# Altium PCB DC_Buck_5V.PcbDoc
Units mil, origin at the board's own origin, x right, y up, seen from the top; angles counter-clockwise.
Board outline 2475 x 1905 mil, 2 copper layers (Top Layer, Bottom Layer); 38 components, 21 nets, 90 pads, 186 vias.
Unrouted connection lines stored in the file: 1.
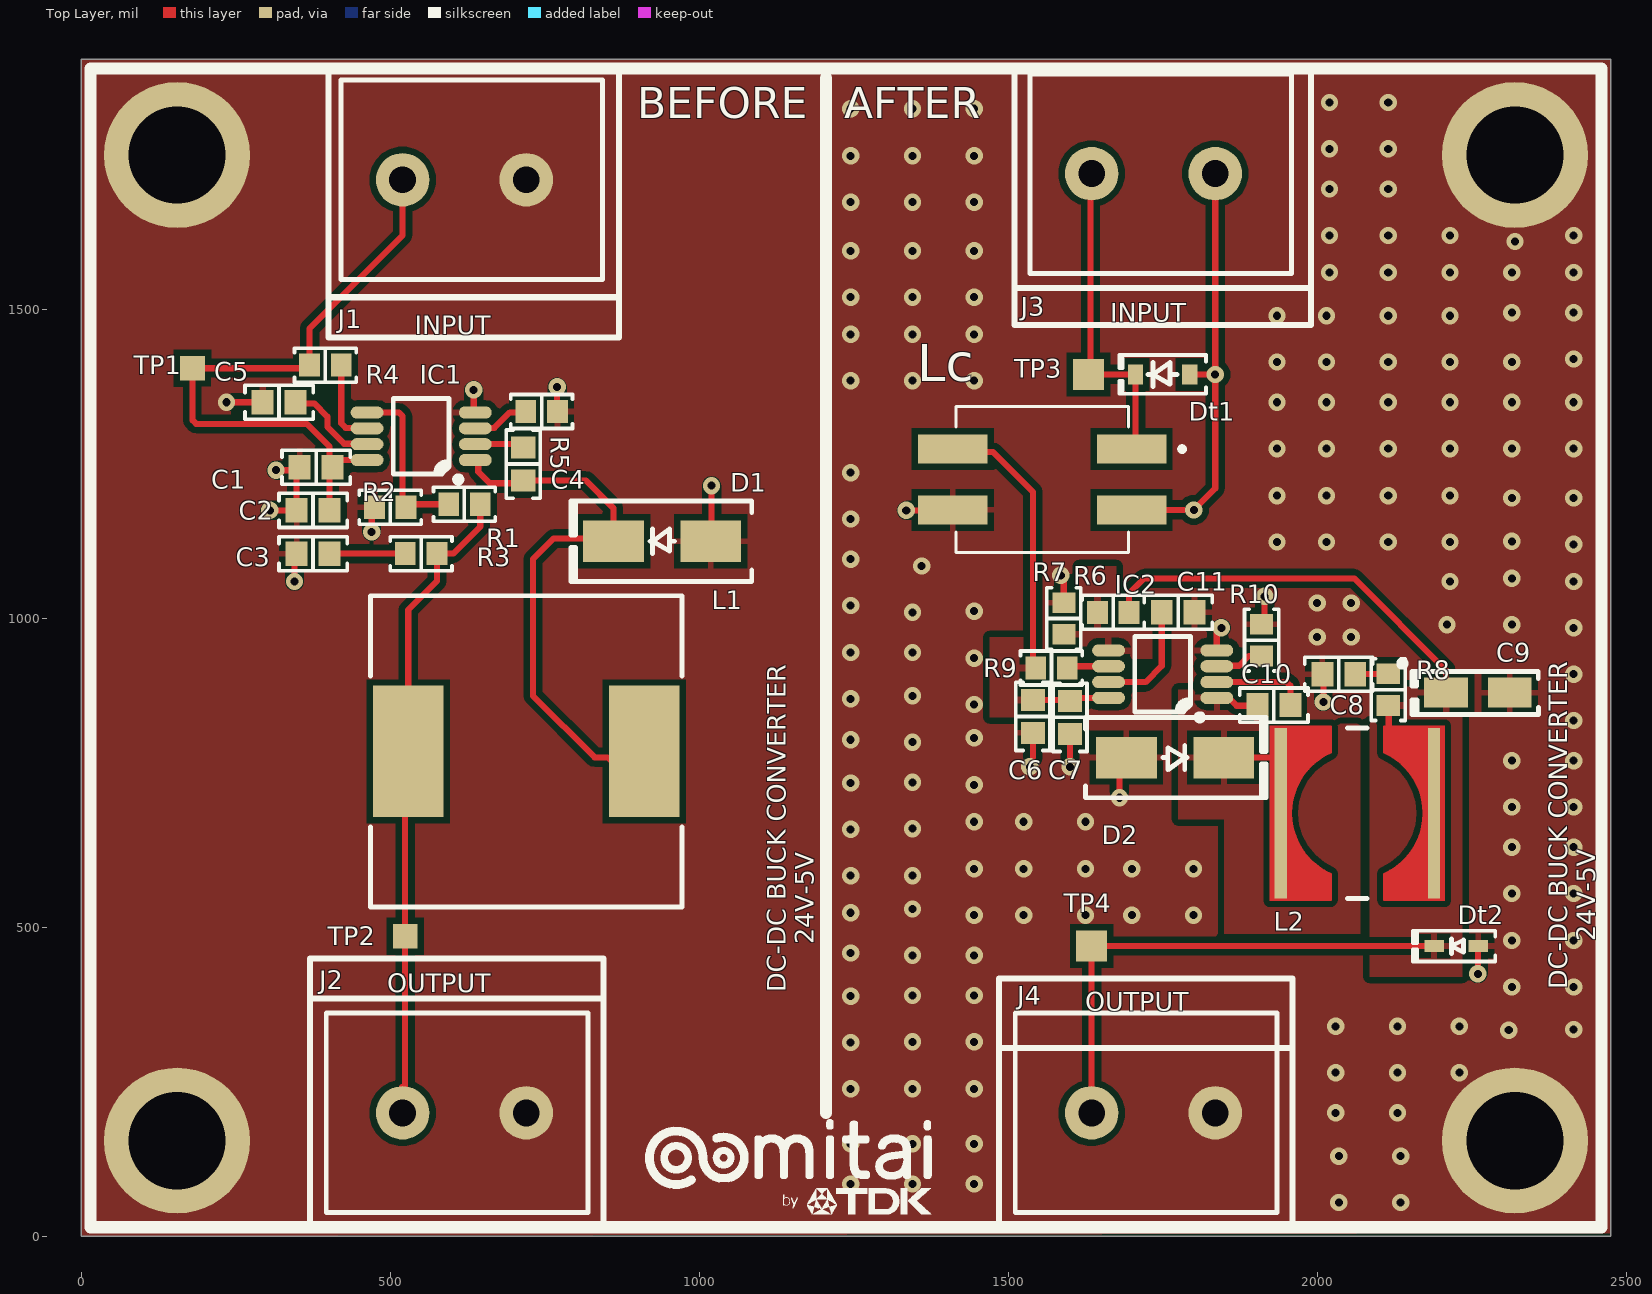
[diagram p0: Top Layer view]
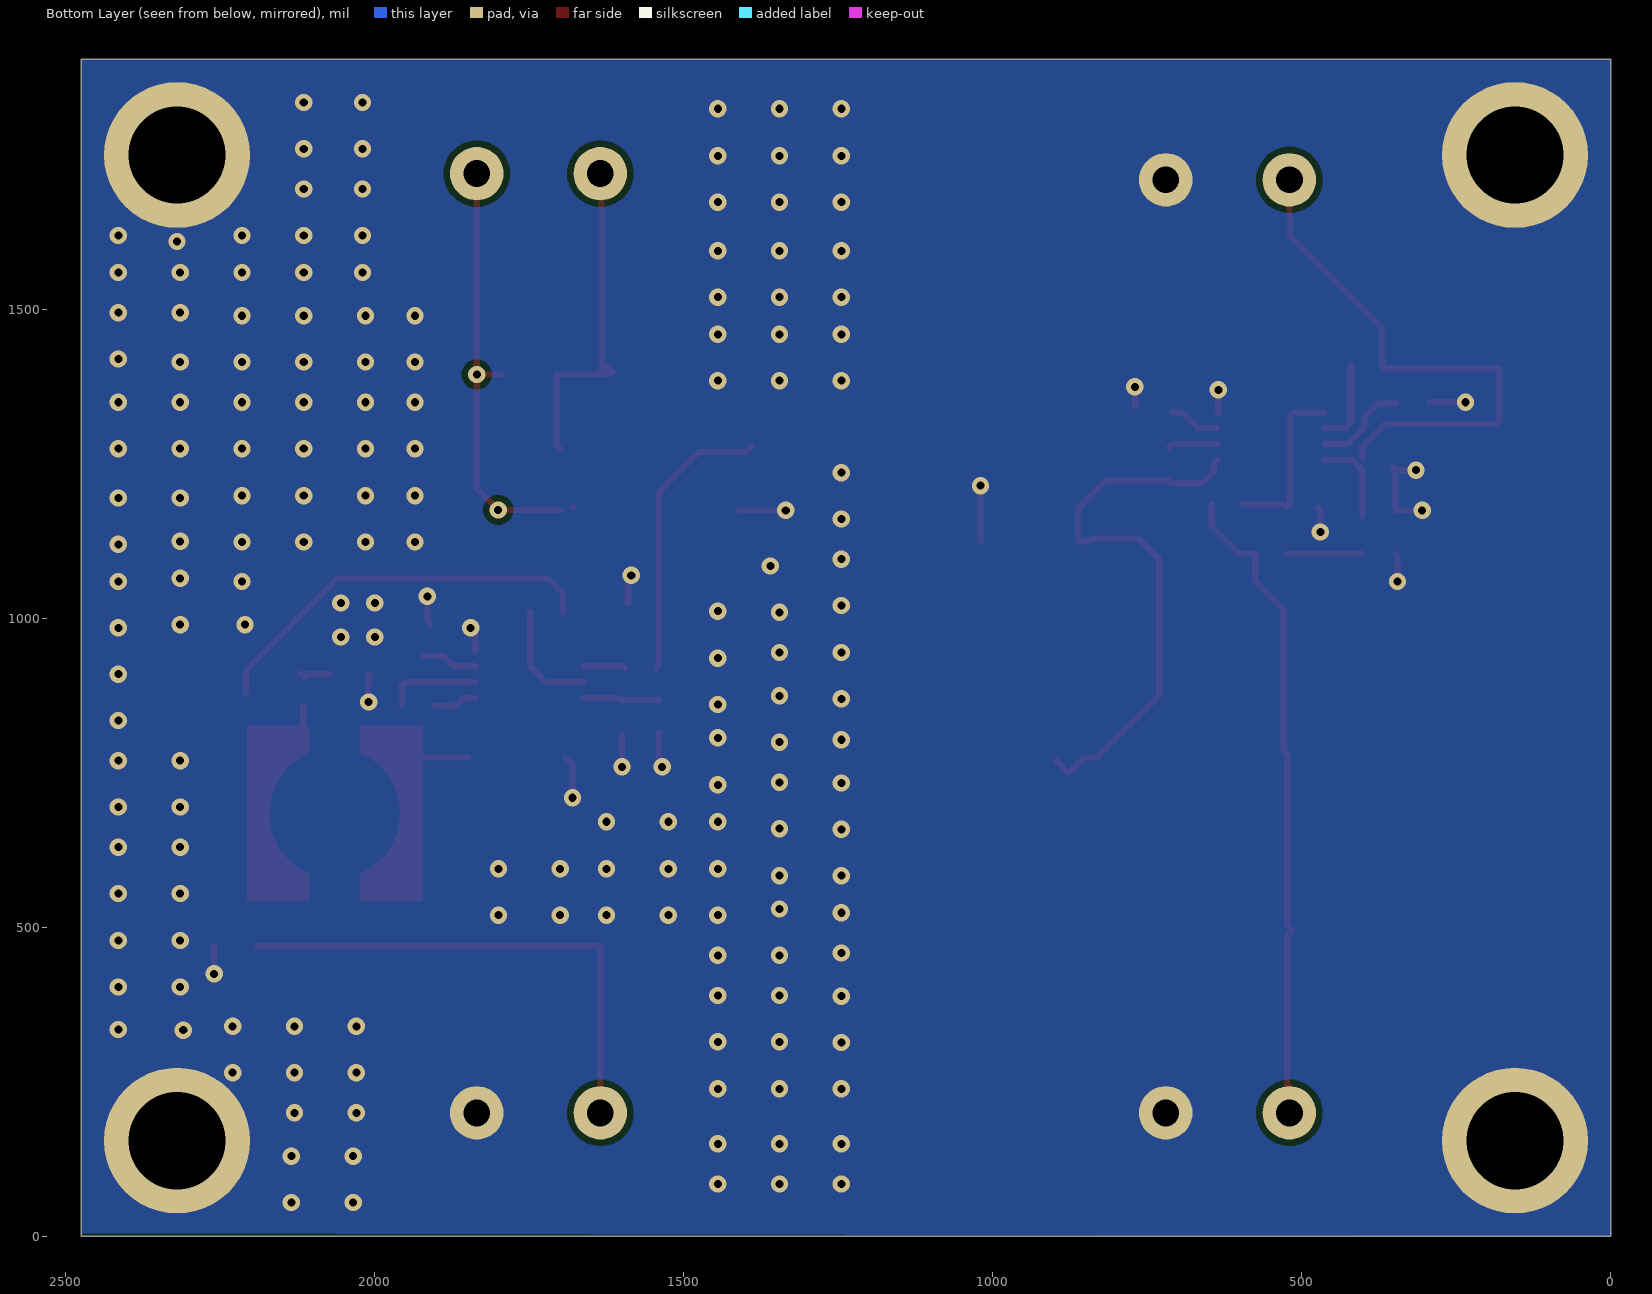
[diagram p1: Bottom Layer view, seen from below]
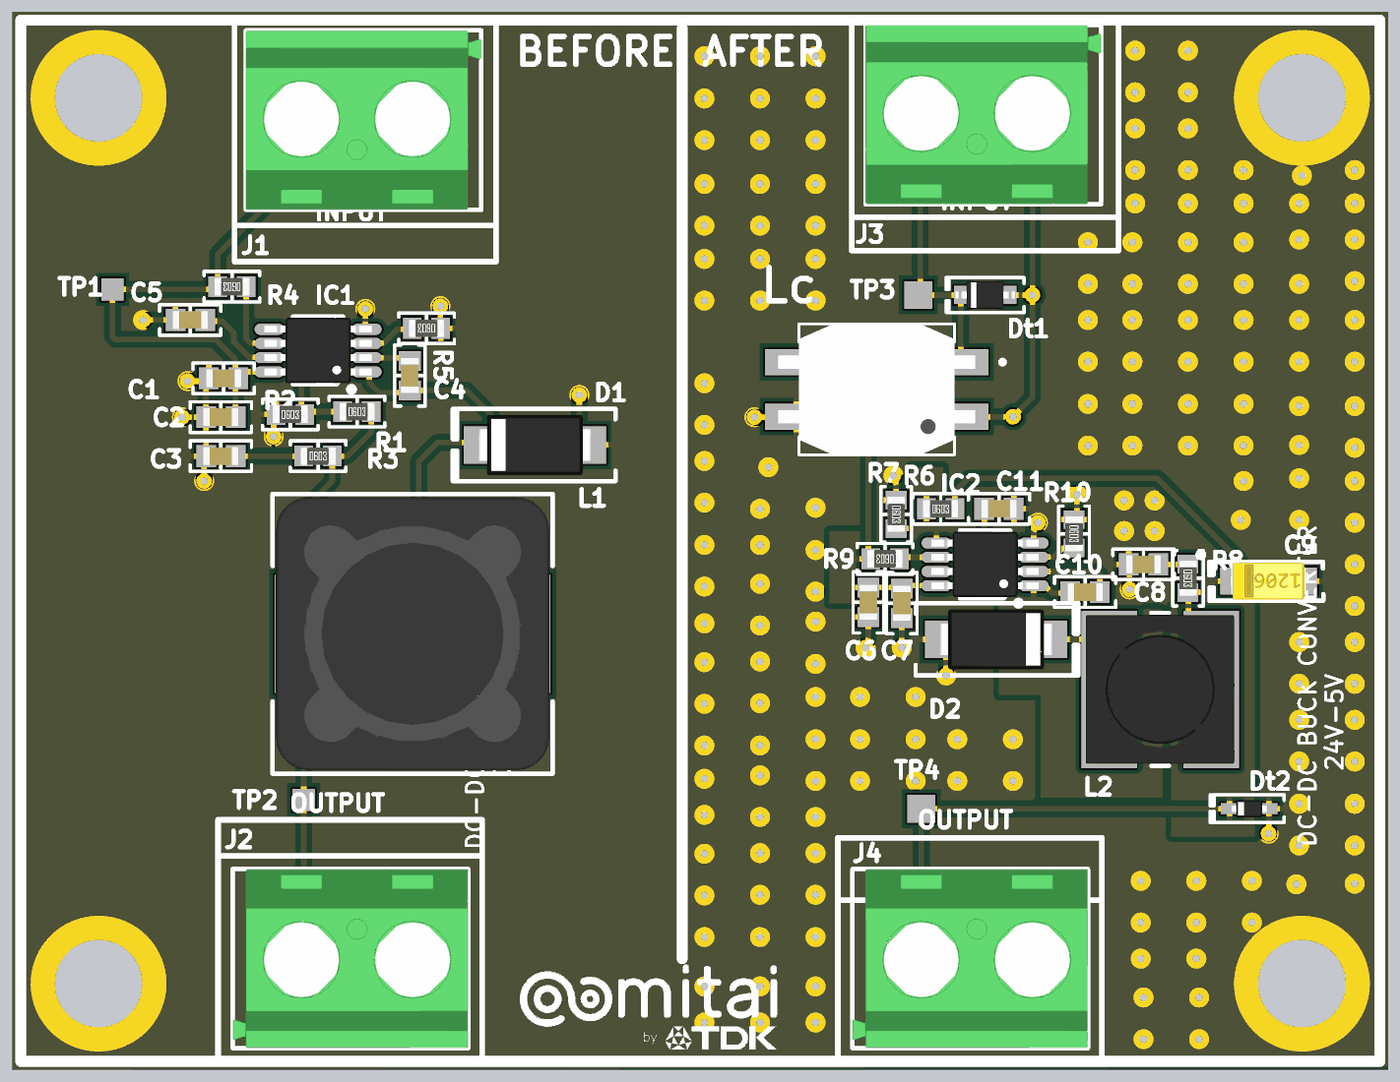
[diagram p2: 3D render of the assembled board from above, using the file's embedded part models]

## Layer stack, top to bottom
Top Solder: solder mask 0.4, Solder Resist, Dk 3.5
Top Layer: signal copper 1.4
Dielectric 1: dielectric 12.6, FR-4, Dk 4.8
Bottom Layer: signal copper 1.4
Bottom Solder: solder mask 0.4, Solder Resist, Dk 3.5

## Board outline
0,0 0,1905 2475,1905 2475,0

## Design rules (kind name [scope] priority, off if disabled: settings)
Clearance [All] p1: gap=10 ignorepadtopadclearanceinfootprint=TRUE except(0: Arc-Hole Track-Hole SMDPad-Hole THPad-Hole Via-Hole Fill-Hole Poly-Hole Region-Hole Text-Hole)
PlaneConnect [All] p1: planeconnectstyle=Direct reliefexpansion=20 reliefentries=4 reliefconductorwidth=10 reliefairgap=10
PolygonConnect [All] p1: thpad.connectstyle=Direct thpad.reliefconductorwidth=10 thpad.reliefentries=4 thpad.polygonreliefangle="90 Angle" thpad.airgapwidth=10 smdpad.connectstyle=Relief smdpad.reliefconductorwidth=10 smdpad.reliefentries=4 smdpad.polygonreliefangle="90 Angle" smdpad.airgapwidth=10 via.connectstyle=Direct via.reliefconductorwidth=10 via.reliefentries=4 via.polygonreliefangle="90 Angle" via.airgapwidth=10
RoutingVias [All] p1: holewidth=13 width=28 viastyle="Through Hole" minholewidth=0 minwidth=26 maxholewidth=28 maxwidth=50
SolderMaskExpansion [All] p1: expansion=4 istentingtop=FALSE
Width [All] p1: maxlimit=30 minlimit=10 preferedwidth=10
29 further rules are at their usual default settings.

## Components (designator, comment, footprint, x,y, rotation, side; value= is the part's Value field where it differs from the comment)
C1 "1 µF" "CAP 0603_1608" 380,1245 r0 top
C2 "0.1 µF" "CAP 0603_1608" 375,1175 r0 top
C3 "15 µF" "CAP 0603_1608" 375,1105 r0 top
C4 "10000 pF" "CAP 0603_1608" 715,1250 r270 top
C5 "0.1 µF" "CAP 0603_1608" 320,1350 r180 top
C6 "1 µF" "CAP 0603_1608" 1540,841.57 r90 top
C7 "0.1 µF" "CAP 0603_1608" 1600,840 r90 top
C8 "15 µF" "CAP 0603_1608" 2035,910 r0 top
C9 "0.1 µF" "CAP POL 1206_3216" 2260,880 r0 top
C10 "10000 pF" "CAP 0603_1608" 1930,860 r180 top
C11 "0.1 µF" "CAP 0603_1608" 1775,1010 r0 top
D1 "MURA110T3G" "DO214AC SMA" 940,1125 r180 top
D2 "MURA110T3G" "DO214AC SMA" 1770,775 r0 top
Dt1 "PESD1IVN24-AX" SOD323 1750,1395 r180 top
Dt2 "ESDBV5V0D5-TP" SOD523F 2225,470 r180 top
IC1 "LM5008MMX/NOPB" "TI VSSOP-8 DGK" 550,1295 r180 top
IC2 "LM5008MMX/NOPB" "TI VSSOP-8 DGK" 1750,910 r180 top
J1 "282837-2" "TE 282837-2" 620,1710 r0 top
J2 "282837-2" "TE 282837-2" 620,200 r180 top
J3 "282837-2" "TE 282837-2" 1735,1720 r0 top
J4 "282837-2" "TE 282837-2" 1735,200 r180 top
L1 "39 µH" "BOURNS SRR1280" 720,785 r180 top
L2 "39µH" "BOURNS SRR6028" 2065,685 r0 top
Lc "B82790C0225N265" FL_B82790C0225N265 1555,1225 r180 top
R1 "1 kOhms" "RES 0603_1608" 620,1185 r0 top
R2 "1 kOhms" "RES 0603_1608" 500,1180 r0 top
R3 "2 Ohms" "RES 0603_1608" 550,1105 r0 top
R4 "76.8 kOhms" "RES 0603_1608" 395,1410 r180 top
R5 "267 kOhms" "RES 0603_1608" 745,1335 r180 top
R6 "1 kOhms" "RES 0603_1608" 1670,1010 r0 top
R7 "1 kOhms" "RES 0603_1608" 1590,1000 r270 top
R8 "2 Ohms" "RES 0603_1608" 2115,885 r270 top
R9 "76.8 kOhms" "RES 0603_1608" 1570,920 r180 top
R10 "267 kOhms" "RES 0603_1608" 1910,965 r270 top
TP1 "TP_1" Testpoint#1 260,1415 r90 top
TP2 "TP_1" Testpoint#1 604.06,495.94 r90 top
TP3 "TP_1" Testpoint#2 1710,1405 r90 top
TP4 "TP_1" Testpoint#3 1715,480 r90 top

## Footprints (in the part's own frame and the unit in brackets; to place one, negate y for a bottom-side part, rotate by r counter-clockwise, add the part's x,y. Pads: shape width x height; smd on the part's side, far side on the other; paste and mask are expansions set on the pad)
"BOURNS SRR1280" [mm] "Precision Wire Wound Inductor, 2-Leads, Body 12.50x12.50mm, IPC Medium Density"
  rect 2.9x5.4 smd: 1(-4.85,0) 2(4.85,0)
  silkscreen extent -6.4,-6.4 6.4,6.4, body extent -6.25,-6.25 6.25,6.25, height 7.9
"BOURNS SRR6028" [mm] "Precision Wire Wound Inductor, 2-Leads, Body 6.80x6.80mm, IPC Medium Density"
  rect 0.5x7 smd: 1(-3.15,0) 2(3.15,0)
  Top Layer region: -3.6,3.6 -1.1,3.6 -1.1,2.5 -1.4,2.4 -1.7,2.1 -1.9,2 -2.1,1.7 -2.3,1.4 -2.5,1 -2.6,0.7 -2.7,0.3 -2.7,0 -3.6,0
  Top Layer region: -3.6,-3.6 -1.1,-3.6 -1.1,-2.5 -1.4,-2.4 -1.7,-2.1 -1.9,-2 -2.1,-1.7 -2.3,-1.4 -2.5,-1 -2.6,-0.7 -2.7,-0.3 -2.7,0 -3.6,0
  Top Layer region: 3.6,-3.6 1.1,-3.6 1.1,-2.5 1.4,-2.4 1.7,-2.1 1.9,-2 2.1,-1.7 2.3,-1.4 2.5,-1 2.6,-0.7 2.7,-0.3 2.7,0 3.6,0
  Top Layer region: 3.6,3.6 1.1,3.6 1.1,2.5 1.4,2.4 1.7,2.1 1.9,2 2.1,1.7 2.3,1.4 2.5,1 2.6,0.7 2.7,0.3 2.7,0 3.6,0
  Top Layer lines w0.1: -1.1,-3.55 -1.1,-2.5 ; -1.1,-2.5 cw(c0,0) -2.731,0 cw(c0,0) -1.1,2.5 ; -1.1,2.5 -1.1,3.55 ; 1.1,-3.55 1.1,-2.5 ; 1.1,-2.5 ccw(c0,0) 2.731,0 ccw(c0,0) 1.1,2.5 ; 1.1,2.5 1.1,3.55
  silkscreen extent -0.4,-3.5 0.4,3.5, body extent -3.4,-3.4 3.4,3.4, height 2.8
"CAP 0603_1608" [mm] "Chip Capacitor, 2-Leads, Body 1.60x0.80mm, IPC Medium Density"
  rect 0.9x1 smd: 1(-0.675,0) 2(0.675,0)
  silkscreen extent -1.4,-0.7 1.4,0.7, body extent -0.8,-0.41 0.8,0.41, height 0.82
"CAP POL 1206_3216" [mm] "Molded Capacitor, 2-Leads, Body 3.20x1.6mm, IPC Medium Density"
  rect 1.8x1.23 smd: 1(-1.31,0) 2(1.31,0)
  silkscreen extent -3.22,-0.9 2.5,1.32, body extent -1.72,-0.85 1.71,0.85, height 1.7
"DO214AC SMA" [mm] "Molded Diode, 2-Leads, Body 4.30x2.60mm, IPC Medium Density"
  rect 2.5x1.7 smd: 1(-2,0) 2(2,0)
  silkscreen extent -3.68,-1.65 3.75,1.65, body extent -2.6,-1.37 2.6,1.37, height 2.4
FL_B82790C0225N265 [mm]
  rect 2.85x1.2 smd: 1(-3.675,-1.25) 2(3.675,-1.25) 3(3.675,1.25) 4(-3.675,1.25)
  silkscreen extent -5.85,-3 3.55,3, body extent -4.5,-3 4.5,3, height 5.2
"RES 0603_1608" [mm] "Chip Resistor, 2-Leads, Body 1.60x0.80mm, IPC Medium Density"
  rect 0.85x0.95 smd: 1(-0.65,0) 2(0.65,0)
  silkscreen extent -1.27,-0.7 1.27,0.7, body extent -0.8,-0.4 0.8,0.4, height 0.45
SOD323 [mm] "SOD, 2-Leads, Body 1.25x2.50mm, IPC Medium Density"
  rect 0.625x0.83 smd: 1(-1.112,0) 2(1.112,0)
  silkscreen extent -1.78,-0.8 1.78,0.8, body extent -1.36,-0.62 1.36,0.62, height 1.05
SOD523F [mm] "SODFL, 2-Leads, Body 0.80x1.60mm, IPC Medium Density"
  rect 0.8x0.5 smd: 1(-0.9,0) 2(0.9,0)
  silkscreen extent -1.6,-0.64 1.8,0.64, body extent -0.8,-0.4 0.8,0.4, height 0.65
"TE 282837-2" [mm] "Wire to Board Terminal Block Horizontal with Board, 2 Postions, Body 10.76x8.2 mm, Pitch 5.08mm"
  round 2.2 hole 1.1: 1(-2.54,0) 2(2.54,0)
  silkscreen extent -5.08,-4.1 5.68,4.1, body extent -5.08,-4.1 5.68,4.1, height 10.3
Testpoint#1 [mil]
  rect 40x40 smd: TP1(-10,80)
Testpoint#2 [mil]
  rect 50x50 smd: TP3(-10,80)
Testpoint#3 [mil]
  rect 50x50 smd: TP4(-10,80)
"TI VSSOP-8 DGK" [mm] "TSOP, 8-Leads, Body 3.00x3.00mm, Pitch 0.65mm, IPC Medium Density"
  oval 1.35x0.5 smd: 1(-2.225,0.975) 2(-2.225,0.325) 3(-2.225,-0.325) 4(-2.225,-0.975) 5(2.225,-0.975) 6(2.225,-0.325) 7(2.225,0.325) 8(2.225,0.975)
  silkscreen extent -1.65,-1.55 1.15,1.9, body extent -2.45,-1.5 2.45,1.5, height 1.1

## Part data
C1 C6: library part UMK107ABJ105MAHT, "CAP CER 1UF 50V X5R 0603", Device Package="0603 (1608 Metric)", Manufacturer="Taiyo Yuden", Operating Temperature="-55°C ~ 85°C", Ratings=AEC-Q200, Supplier Part Number 1=587-4958-1-ND, Temperature Coefficient=X5R, Tolerance=±20%, Voltage - Rated=50V, Applications="Automotive, SMPS Filtering", Capacitance="1 µF", ComponentLink1Description=Datasheet, ComponentLink1URL=https://www.yuden.co.jp/productdata/catalog/mlcc_all_hq_e.pdf, ComponentLink2Description="DigiKey Link", ComponentLink2URL=https://www.digikey.com/en/products/detail/taiyo-yuden/UMK107ABJ105MAHT/6563551, lastupdated="01/10/2023 19:09:10", Lifecycle Status=Active, Minimum Order=1, Mounting Type="Surface Mount, MLCC", Package / Case="0603 (1608 Metric)", Packaging=TapeAndReel, Part Number=UMK107ABJ105MAHT, Part Status=Active, partid=3194, price=0.03, series=M, Size / Dimension="0.063\" L x 0.031\" W (1.60mm x 0.80mm)", Supplier 1=DigiKey, Thickness (Max)="0.037\" (0.95mm)"
C2 C5 C7 C11: library part C0603C104K5RAC7411, "CAP CER 0.1UF 50V X7R 0603", Device Package="0603 (1608 Metric)", Manufacturer=KEMET, Operating Temperature="-55°C ~ 125°C", Supplier Part Number 1=399-C0603C104K5RAC7411CT-ND, Temperature Coefficient=X7R, Tolerance=±10%, Voltage - Rated=50V, Applications="Bypass, Decoupling", Capacitance="0.1 µF", ComponentLink1Description=Datasheet, ComponentLink1URL=https://api.kemet.com/component-edge/download/datasheet/C0603C104K5RAC7411.pdf, ComponentLink2Description="DigiKey Link", ComponentLink2URL=https://www.digikey.com/en/products/detail/kemet/C0603C104K5RAC7411/3317013, lastupdated="01/10/2023 19:09:12", Lifecycle Status=Active, Minimum Order=1, Mounting Type="Surface Mount, MLCC", Package / Case="0603 (1608 Metric)", Packaging=TapeAndReel, Part Number=C0603C104K5RAC7411, Part Status=Active, partid=2233, price=0.01, series="SMD Comm X7R", Size / Dimension="0.063\" L x 0.031\" W (1.60mm x 0.80mm)", Supplier 1=DigiKey, Thickness (Max)="0.035\" (0.90mm)"
C3: library part C1608X5R0J156M080AC, "CAP CER 15UF 6.3V X5R 0603", Device Package="0603 (1608 Metric)", Manufacturer="TDK Corporation", Operating Temperature="-55°C ~ 85°C", Supplier Part Number 1=445-8027-1-ND, Temperature Coefficient=X5R, Tolerance=±20%, Voltage - Rated=6.3V, Applications="General Purpose", Capacitance="15 µF", ComponentLink1Description=Datasheet, ComponentLink1URL=https://product.tdk.com/info/en/catalog/datasheets/mlcc_commercial_general_en.pdf?ref_disty=digikey, ComponentLink2Description="DigiKey Link", ComponentLink2URL=https://www.digikey.com/en/products/detail/tdk-corporation/C1608X5R0J156M080AC/2792253, Features="Low ESL", lastupdated="01/10/2023 19:09:11", Lifecycle Status=Active, Minimum Order=1, Mounting Type="Surface Mount, MLCC", Package / Case="0603 (1608 Metric)", Packaging=TapeAndReel, Part Number=C1608X5R0J156M080AC, Part Status=Active, partid=2610, price=0.07, series=C, Size / Dimension="0.063\" L x 0.031\" W (1.60mm x 0.80mm)", Supplier 1=DigiKey, Thickness (Max)="0.039\" (1.00mm)"
C4 C10: library part AC0603KRX7R0BB103, "CAP CER 10000PF 100V X7R 0603", Device Package="0603 (1608 Metric)", Manufacturer=Yageo, Operating Temperature="-55°C ~ 125°C", Ratings=AEC-Q200, Supplier Part Number 1=311-3100-1-ND, Temperature Coefficient=X7R, Tolerance=±10%, Voltage - Rated=100V, Applications=Automotive, Capacitance="10000 pF", ComponentLink1Description=Datasheet, ComponentLink1URL=http://www.yageo.com/NewPortal/_en/search/productDocs.jsp?YageoPartNumber=AC0603KRX7R0BB103, ComponentLink2Description="DigiKey Link", ComponentLink2URL=https://www.digikey.com/en/products/detail/yageo/AC0603KRX7R0BB103/6643086, lastupdated="01/10/2023 19:09:12", Lifecycle Status=Active, Minimum Order=1, Mounting Type="Surface Mount, MLCC", Package / Case="0603 (1608 Metric)", Packaging=TapeAndReel, Part Number=AC0603KRX7R0BB103, Part Status=Active, partid=2218, price=0.01, series=AC, Size / Dimension="0.063\" L x 0.031\" W (1.60mm x 0.80mm)", Supplier 1=DigiKey, Thickness (Max)="0.035\" (0.90mm)"
C8: library part C1608X5R1A156M080AC, "CAP CER 15UF 10V X5R 0603", Device Package="0603 (1608 Metric)", Manufacturer="TDK Corporation", Operating Temperature="-55°C ~ 85°C", Supplier Part Number 1=445-9117-1-ND, Temperature Coefficient=X5R, Tolerance=±20%, Voltage - Rated=10V, Applications="General Purpose", Capacitance="15 µF", ComponentLink1Description=Datasheet, ComponentLink1URL=https://product.tdk.com/info/en/catalog/datasheets/mlcc_commercial_general_en.pdf?ref_disty=digikey, ComponentLink2Description="DigiKey Link", ComponentLink2URL=https://www.digikey.com/en/products/detail/tdk-corporation/C1608X5R1A156M080AC/3661558, Features="Low ESL", lastupdated="26/11/2023 20:10:06", Lifecycle Status=Active, Minimum Order=1, Mounting Type="Surface Mount, MLCC", Package / Case="0603 (1608 Metric)", Packaging=TapeAndReel, Part Number=C1608X5R1A156M080AC, Part Status=Active, partid=18683, price=0.07, series=C, Size / Dimension="0.063\" L x 0.031\" W (1.60mm x 0.80mm)", Supplier 1=DigiKey, Thickness (Max)="0.039\" (1.00mm)"
C9: library part T494A104K035AT, "CAP TANT 0.1UF 10% 35V 1206", Device Package="1206 (3216 Metric)", ESR (Equivalent Series Resistance)=10Ohm, Lifetime @ Temp.="2000 Hrs @ 125°C", Manufacturer=KEMET, Manufacturer Size Code=A, Operating Temperature="-55°C ~ 125°C", Supplier Part Number 1=399-10216-1-ND, Tolerance=±10%, Voltage - Rated="35 V", Capacitance="0.1 µF", ComponentLink1Description=Datasheet, ComponentLink1URL=https://api.kemet.com/component-edge/download/datasheet/T494A104K035AT.pdf, ComponentLink2Description="DigiKey Link", ComponentLink2URL=https://www.digikey.com/en/products/detail/kemet/T494A104K035AT/3759695, Features="General Purpose", Height - Seated (Max)="0.071\" (1.80mm)", lastupdated="26/11/2023 21:00:31", Lifecycle Status=Active, Minimum Order=1, Mounting Type="Surface Mount", Package / Case="1206 (3216 Metric)", Packaging=TapeAndReel, Part Number=T494A104K035AT, Part Status=Active, partid=208, price=0.14, series=T494, Size / Dimension="0.126\" L x 0.063\" W (3.20mm x 1.60mm)", Supplier 1=DigiKey, Type=Molded
D1 D2: "DIODE GEN PURP 100V 2A SMA", Current - Average Rectified (Io)=2A, Current - Reverse Leakage @ Vr="2µA @ 100V", Manufacturer="ON Semiconductor", Operating Temperature - Junction="-65°C ~ 175°C", Package / Case="DO-214AC, SMA", Supplier Device Package=SMA, Supplier Part Number 1=MURA110T3GOSCT-ND, Voltage - DC Reverse (Vr) (Max)=100V, Voltage - Forward (Vf) (Max) @ If="875mV @ 1A", ComponentLink1Description=Datasheet, ComponentLink1URL=//media.digikey.com/pdf/Data%20Sheets/ON%20Semiconductor%20PDFs/MURA105T3-D.pdf, ComponentLink2Description="DigiKey Link", ComponentLink2URL=http://digikey.com/product-detail/en/on-semiconductor/MURA110T3G/MURA110T3GOSCT-ND/964568, Diode Type=Standard, lastupdated="01/10/2023 20:19:19", Lifecycle Status=Active, Minimum Order=1, Mounting Type="Surface Mount", Packaging=TapeAndReel, Part Number=MURA110T3G, Part Status=Active, partid=641, price=0.10, Reverse Recovery Time (trr)=30ns, series=-, Speed="Fast Recovery =< 500ns, > 200mA (Io)", Supplier 1=DigiKey
Dt1: "TVS DIODE 24VWM 42VC SOD323", Capacitance @ Frequency="14pF @ 1MHz", Current - Peak Pulse (10/1000µs)="3.5A (8/20µs)", Manufacturer="Nexperia USA Inc.", Operating Temperature="-55°C ~ 150°C (TA)", Package / Case="SC-76, SOD-323", Power Line Protection=No, Supplier Device Package=SOD-323, Supplier Part Number 1=1727-7620-1-ND, Voltage - Breakdown (Min)=25.5V, Voltage - Clamping (Max) @ Ipp=42V, Voltage - Reverse Standoff (Typ)="24V (Max)", Applications=CAN, Bidirectional Channels=1, ComponentLink1Description=Datasheet, ComponentLink1URL=https://assets.nexperia.com/documents/data-sheet/PESD1IVN24-A.pdf, ComponentLink2Description="DigiKey Link", ComponentLink2URL=https://www.digikey.com/en/products/detail/nexperia-usa-inc/PESD1IVN24-AX/8131025, lastupdated="04/12/2023 21:44:28", Lifecycle Status=Active, Minimum Order=1, Mounting Type="Surface Mount", Packaging=TapeAndReel, Part Number=PESD1IVN24-AX, Part Status=Active, partid=9975, price=0.04, series=-, Supplier 1=DigiKey, Type=Zener
Dt2: "TVS DIODE 5VWM 13VC SOD523", Capacitance @ Frequency="3pF @ 1MHz", Current - Peak Pulse (10/1000µs)="4A (8/20µs)", Manufacturer="Micro Commercial Co", Operating Temperature="-55°C ~ 150°C (TJ)", Package / Case="SC-79, SOD-523", Power - Peak Pulse=52W, Power Line Protection=No, Supplier Device Package=SOD-523, Supplier Part Number 1=353-ESDBV5V0D5-TPCT-ND, Voltage - Breakdown (Min)=5.6V, Voltage - Clamping (Max) @ Ipp=13V, Voltage - Reverse Standoff (Typ)="5V (Max)", Applications="General Purpose", Bidirectional Channels=1, ComponentLink1Description=Datasheet, ComponentLink1URL=https://www.mccsemi.com/pdf/Products/ESDBV5V0D5(SOD-523)-A.pdf, ComponentLink2Description="DigiKey Link", ComponentLink2URL=https://www.digikey.com/en/products/detail/micro-commercial-co/ESDBV5V0D5-TP/8554662, lastupdated="04/12/2023 21:44:21", Lifecycle Status=Active, Minimum Order=1, Mounting Type="Surface Mount", Packaging=TapeAndReel, Part Number=ESDBV5V0D5-TP, Part Status=Active, partid=9797, price=0.06, series=-, Supplier 1=DigiKey, Type=Zener, Unidirectional Channels=1
IC1 IC2: "IC REG BUCK ADJ 350MA 8VSSOP", Current - Output=350mA, Device Package="8-TSSOP, 8-MSOP (0.118\", 3.00mm Width)", Frequency - Switching="50kHz ~ 600kHz", Manufacturer="Texas Instruments", Operating Temperature="-40°C ~ 125°C (TJ)", Supplier Device Package=8-VSSOP, Supplier Part Number 1=296-35288-2-ND, Voltage - Input (Max)=95V, Voltage - Input (Min)=9.5V, Voltage - Output (Max)=75V, Voltage - Output (Min/Fixed)=2.5V, ComponentLink1Description=Datasheet, ComponentLink1URL=http://www.ti.com/general/docs/suppproductinfo.tsp?distId=10&gotoUrl=http%3A%2F%2Fwww.ti.com%2Flit%2Fgpn%2Flm5008, ComponentLink2Description="DigiKey Link", ComponentLink2URL=//digikey.com/product-detail/en/texas-instruments/LM5008MMX-NOPB/296-35288-2-ND/1871803, Function=Step-Down, lastupdated="12/12/2019 10:27:36", Lifecycle Status=0, Minimum Order=1, Mounting Type="Surface Mount", Number of Outputs=1, Output Configuration=Positive, Output Type=Adjustable, Package / Case="8-TSSOP, 8-MSOP (0.118\", 3.00mm Width)", Packaging=TapeAndReel, Part Number=LM5008MMX/NOPB, Part Status=Active, price=1.30, series=-, Supplier 1=DigiKey, Synchronous Rectifier=No, Topology=Buck
J1 J2 J3 J4: "TERM BLK 2P SIDE ENT 5.08MM PCB", Color=Green, Current="13.5 A", Manufacturer="TE Connectivity AMP Connectors", Supplier Part Number 1=A113320-ND, Voltage="300 V", ComponentLink1Description=Datasheet, ComponentLink1URL=https://www.te.com/commerce/DocumentDelivery/DDEController?Action=srchrtrv&DocNm=282837&DocType=Customer+Drawing&DocLang=English, ComponentLink2Description="DigiKey Link", ComponentLink2URL=https://www.digikey.com/en/products/detail/te-connectivity-amp-connectors/282837-2/2187973, Features="Interlocking (Side)", lastupdated="21/06/2022 15:00:23", Lifecycle Status=Active, Mating Orientation="Horizontal with Board", Minimum Order=1, Mounting Type="Through Hole", Number of Levels=1, Packaging=Tray, Part Number=282837-2, Part Status=Active, Pitch="0.200\" (5.08mm)", Positions Per Level=2, price=0.31, series=Buchanan, Supplier 1=DigiKey, Wire Gauge="16-28 AWG", Wire Termination="Screw - Rising Cage Clamp"
L1: library part SRR1280-390M, "FIXED IND 39UH 3.2A 70 MOHM SMD", Current - Saturation=3.1A, Current Rating (Amps)="3.2 A", DC Resistance (DCR)="70mOhm Max", Device Package=Nonstandard, Frequency - Self Resonant=8.5MHz, Inductance Frequency - Test="100 kHz", Manufacturer="Bourns Inc.", Operating Temperature="-40°C ~ 125°C", Q @ Freq="24 @ 2.52MHz", Supplier Part Number 1=118-SRR1280-390MCT-ND, Tolerance=±20%, ComponentLink1Description=Datasheet, ComponentLink1URL=https://www.bourns.com/docs/Product-Datasheets/SRR1280.pdf, ComponentLink2Description="DigiKey Link", ComponentLink2URL=https://www.digikey.com/en/products/detail/bourns-inc/SRR1280-390M/1969999, Height - Seated (Max)="0.315\" (8.00mm)", Inductance="39 µH", lastupdated="01/10/2023 20:27:20", Lifecycle Status=Active, Material - Core=Ferrite, Minimum Order=1, Mounting Type="Surface Mount", Package / Case=Nonstandard, Packaging=TapeAndReel, Part Number=SRR1280-390M, Part Status=Active, partid=15, price=0.51, series=SRR1280, Shielding=Shielded, Size / Dimension="0.492\" L x 0.492\" W (12.50mm x 12.50mm)", Supplier 1=DigiKey, Type="Drum Core, Wirewound"
L2: library part SRR6028-390Y, "FIXED IND 39UH 1A 195 MOHM SMD", Current - Saturation=750mA, Current Rating (Amps)=1A, DC Resistance (DCR)="195mOhm Max", Device Package=Nonstandard, Frequency - Self Resonant=17MHz, Inductance Frequency - Test=100kHz, Manufacturer="Bourns Inc.", Operating Temperature="-40°C ~ 125°C", Q @ Freq="10 @ 2.52MHz", Supplier Part Number 1=SRR6028-390YCT-ND, Tolerance=±30%, ComponentLink1Description=Datasheet, ComponentLink1URL=https://www.bourns.com/docs/Product-Datasheets/SRR6028.pdf, ComponentLink2Description="DigiKey Link", ComponentLink2URL=http://digikey.com/product-detail/en/bourns-inc/SRR6028-390Y/SRR6028-390YCT-ND/2127560, Height - Seated (Max)="0.118\" (3.00mm)", Inductance=39µH, lastupdated="26/11/2023 21:31:01", Lifecycle Status=Active, Material - Core=Ferrite, Minimum Order=1, Mounting Type="Surface Mount", Package / Case=Nonstandard, Packaging=TapeAndReel, Part Number=SRR6028-390Y, Part Status=Active, partid=47, price=0.40, series=SRR6028, Shielding=Shielded, Size / Dimension="0.268\" L x 0.268\" W (6.80mm x 6.80mm)", Supplier 1=DigiKey, Type=Wirewound
Lc: "Common Mode Filter / Choke, 0.005 - 4.7 mH, 200 - 1000 mA", Package="NON STANDARD-4 TDK", Check_prices=https://www.snapeda.com/parts/B82790C0225N265/EPCOS/view-part/?ref=eda, MF=EPCOS, MP=B82790C0225N265, SnapEDA_Link=https://www.snapeda.com/parts/B82790C0225N265/EPCOS/view-part/?ref=snap
R1 R2 R6 R7: library part AT0603DRD071KL, "RES SMD 1K OHM 0.5% 1/10W 0603", Device Package="0603 (1608 Metric)", Manufacturer=Yageo, Operating Temperature="-55°C ~ 155°C", Power (Watts)="0.1W, 1/10W", Ratings=AEC-Q200, Supplier Device Package=0603, Supplier Part Number 1=YAG2115CT-ND, Temperature Coefficient=±25ppm/°C, Tolerance=±0.5%, ComponentLink1Description=Datasheet, ComponentLink1URL=http://www.yageo.com/documents/recent/PYu-AT_51_RoHS_L_5.pdf, ComponentLink2Description="DigiKey Link", ComponentLink2URL=https://www.digikey.com/en/products/detail/yageo/AT0603DRD071KL/5138634, Composition="Thin Film", Features="Anti-Sulfur, Automotive AEC-Q200, Moisture Resistant", Height - Seated (Max)="0.022\" (0.55mm)", lastupdated="01/10/2023 19:35:39", Lifecycle Status=Active, Minimum Order=1, Number of Terminations=2, Package / Case="0603 (1608 Metric)", Packaging=TapeAndReel, Part Number=AT0603DRD071KL, Part Status=Active, partid=4899, price=0.02, Resistance="1 kOhms", series=AT, Size / Dimension="0.063\" L x 0.031\" W (1.60mm x 0.80mm)", Supplier 1=DigiKey
R3 R8: library part SFR03EZPJ2R0, "SULFUR TOLERANT CHIP RESISTORS", Device Package="0603 (1608 Metric)", Manufacturer="Rohm Semiconductor", Operating Temperature="-55°C ~ 155°C", Power (Watts)="0.1W, 1/10W", Ratings=AEC-Q200, Supplier Device Package=0603, Supplier Part Number 1=511-SFR03EZPJ2R0CT-ND, Temperature Coefficient=±400ppm/°C, Tolerance=±5%, ComponentLink1Description=Datasheet, ComponentLink1URL=https://fscdn.rohm.com/en/products/databook/datasheet/passive/resistor/chip_resistor/sfr-e.pdf, ComponentLink2Description="DigiKey Link", ComponentLink2URL=https://www.digikey.com/en/products/detail/rohm-semiconductor/SFR03EZPJ2R0/16179956, Composition="Thick Film", Features="Anti-Sulfur, Automotive AEC-Q200", Height - Seated (Max)="0.022\" (0.55mm)", lastupdated="01/10/2023 19:33:15", Lifecycle Status=Active, Minimum Order=1, Number of Terminations=2, Package / Case="0603 (1608 Metric)", Packaging=TapeAndReel, Part Number=SFR03EZPJ2R0, Part Status=Active, partid=68512, price=0.01, Resistance="2 Ohms", series=SFR, Size / Dimension="0.063\" L x 0.031\" W (1.60mm x 0.80mm)", Supplier 1=DigiKey
R4 R9: library part RG1608P-7682-B-T5, "RES SMD 76.8KOHM 0.1% 1/10W 0603", Device Package="0603 (1608 Metric)", Manufacturer=Susumu, Operating Temperature="-55°C ~ 155°C", Power (Watts)="0.1W, 1/10W", Ratings=AEC-Q200, Supplier Device Package=0603, Supplier Part Number 1=RG16P76.8KBCT-ND, Temperature Coefficient=±25ppm/°C, Tolerance=±0.1%, ComponentLink1Description=Datasheet, ComponentLink1URL=//media.digikey.com/pdf/Data%20Sheets/Susumu%20PDFs/RG_RM_RGH_Oct2012.pdf, ComponentLink2Description="DigiKey Link", ComponentLink2URL=https://www.digikey.com/en/products/detail/susumu/RG1608P-7682-B-T5/1240630, Composition="Thin Film", Features="Anti-Sulfur, Automotive AEC-Q200", Height - Seated (Max)="0.020\" (0.50mm)", lastupdated="01/10/2023 19:35:32", Lifecycle Status=Active, Minimum Order=1, Number of Terminations=2, Package / Case="0603 (1608 Metric)", Packaging=TapeAndReel, Part Number=RG1608P-7682-B-T5, Part Status=Active, partid=6774, price=0.05, Resistance="76.8 kOhms", series=RG, Size / Dimension="0.063\" L x 0.031\" W (1.60mm x 0.80mm)", Supplier 1=DigiKey
R5 R10: library part RT0603BRD07267KL, "RES SMD 267K OHM 0.1% 1/10W 0603", Device Package="0603 (1608 Metric)", Manufacturer=Yageo, Operating Temperature="-55°C ~ 155°C", Power (Watts)="0.1W, 1/10W", Supplier Device Package=0603, Supplier Part Number 1=YAG4514CT-ND, Temperature Coefficient=±25ppm/°C, Tolerance=±0.1%, ComponentLink1Description=Datasheet, ComponentLink1URL=https://www.yageo.com/upload/media/product/productsearch/datasheet/rchip/PYu-RT_1-to-0.01_RoHS_L_11.pdf, ComponentLink2Description="DigiKey Link", ComponentLink2URL=https://www.digikey.com/en/products/detail/yageo/RT0603BRD07267KL/1072399, Composition="Thin Film", Height - Seated (Max)="0.022\" (0.55mm)", lastupdated="01/10/2023 19:35:34", Lifecycle Status=Active, Minimum Order=1, Number of Terminations=2, Package / Case="0603 (1608 Metric)", Packaging=TapeAndReel, Part Number=RT0603BRD07267KL, Part Status=Active, partid=6334, price=0.03, Resistance="267 kOhms", series=RT, Size / Dimension="0.063\" L x 0.031\" W (1.60mm x 0.80mm)", Supplier 1=DigiKey
TP1 TP2 TP3 TP4: library part Testpoint

## Free pads (board coordinates)
  round 236.22 hole 157.48: 17(155,155) 17(155,1750) 17(2320,155) 17(2320,1750)

## Via types
v1: diameter 28, hole 13, Top Layer to Bottom Layer, 186 vias

## Nets (pads, with @x,y where several pads share a name; then routed paths per layer and width w, separated by ;. In a path a pad name is that pad's centre, name@x,y a point inside that pad or via, vN(x,y) a via of type N, cw(c..) or ccw(c..) an arc to the next point about the centre after c; other vN are vias at no path point)
BST: C10.1 IC2.2 | length 152.7
  Top Layer w10: IC2.2 1950.72,897.2 1956.57,891.35 C10.1
FB: IC2.5 R6.1 R7.2
GND: C1.1 C2.1 C3.1 C5.2 C6.1 C7.1 C8.1 C9.2 C11.2 D1.1 D2.1 Dt2.1 IC1.4 IC2.4 J1.2 J2.1 J4.1 Lc.3 pad.17 R2.1 R5.1 R7.1 R10.1 | length 861
  Top Layer w10: v1@245,1350 C5.2 ; v1(305,1175) C2.1 C1.1@348.43,1240 ; v1(315,1240) C1.1@348.43,1240 ; v1(345,1060) 345,1101.57 C3.1 ; C1.1 C1.1@348.43,1240 ; v1(470,1140) 470,1175.59 R2.1 ; IC1.4@635,1332.64 v1(635,1370) ; R5.1@770,1343.43 v1(770,1375) ; D1.1 1020,1126.26 v1(1020,1215) ; v1(1335,1175) 1409.53,1175 Lc.3 ; 1540,775 C6.1 ; v1@1590,1060 R7.1 R7.1@1590.59,1025 ; 1600,775 C7.1 ; v1@1680,720 1680,763.74 D2.1 ; IC2.4 1837.6,977.6 v1(1845,985) ; R10.1 1915,995.59 v1@1915,1025 ; C8.1 2010,908.43 v1(2010,865) ; v1(2260,425) 2260.43,425.43 Dt2.1
  other v1: 2035,55 2135,55 1245,85 1345,85 1445,85 2035,130 2135,130 1245,150 1345,150 1445,150 2030,200 2130,200 1245,238.85 1345,238.85 1445,238.85 2030,265 2130,265 2230,265 1245,313.85 1345,315 1445,315 2310,333.85 2415,335 2030,340 2130,340 2230,340 1245,388.85 1345,390 1445,390 2315,403.85 2415,403.85 1345,455 1445,455 1245,458.85 2315,478.85 2415,478.85 1445,520 1525,520 1625,520 1700,520 1800,520 1245,523.85 1345,530 2315,555 2415,555 1245,583.85 1345,583.85 1445,595 1525,595 1625,595 1700,595 1800,595 2315,630 2415,630 1245,658.85 1345,660 1445,671.15 1525,671.15 1625,671.15 2315,695 2415,695 1680,710 1445,730.79 1245,733.85 1345,735 1535,760 1600,760 2315,770 2415,770 1345,800 1245,803.85 1445,806.94 2415,835 1445,860.79 1245,870 1345,875 2415,910 1445,935.79 1245,945 1345,945 2000,970 2055,970 2415,985 2210,990 2315,990 1345,1010 1445,1011.94 1245,1021.15 2000,1025 2055,1025 1915,1036 2215,1060 2415,1060 2315,1065 1585,1070 1360,1085 1245,1096.15 2415,1120 1935,1123.85 2015,1123.85 2115,1123.85 2215,1123.85 2315,1125 1245,1161.15 2315,1195 2415,1195 1935,1198.85 2015,1198.85 2115,1198.85 2215,1198.85 1245,1236.15 1935,1275 2015,1275 2115,1275 2215,1275 2315,1275 2415,1275 235,1350 1935,1350 2015,1350 2115,1350 2215,1350 2315,1350 2415,1350 1245,1385 1345,1385 1445,1385 1935,1415 2015,1415 2115,1415 2215,1415 2315,1415 2415,1420 1245,1460 1345,1460 1445,1460 1935,1490 2015,1490 2115,1490 2215,1490 2315,1495 2415,1495 1245,1520 1345,1520 1445,1520 2020,1560 2115,1560 2215,1560 2315,1560 2415,1560 1245,1595 1345,1595 1445,1595 2320,1610 2020,1620 2115,1620 2215,1620 2415,1620 1245,1673.85 1345,1673.85 1445,1673.85 2020,1695 2115,1695 1245,1748.85 1345,1748.85 1445,1748.85 2020,1760 2115,1760 1245,1825 1345,1825 1445,1825 2020,1835 2115,1835
GND_IN: Dt1.1 J3.2 Lc.4 | length 685.7
  Top Layer w10: Lc.4@1679.68,1180.79 Lc.4@1680.08,1180.39 ; Lc.4 1785,1175.79 ; Dt1.1 v1(1835,1395) ; v1(1800.29,1175.79) 1835,1210.49 v1(1835,1395) ; J3.2 v1(1835,1395)
IN: C6.2 C7.2 IC2.8 Lc.2 R9.2 | length 594.6
  Top Layer w10: Lc.2@1390.32,1279.21 1400.09,1269.44 1475.56,1269.44 1540,1205 1540,926.38 1544.41,921.97 R9.2 ; C6.2@1541.57,866.57 C6.2 1598.43,868.15 C7.2 1605.04,871.61 IC2.8
NetC1_2: C1.2 C2.2 IC1.8 J1.1 R4.2 TP1.TP1 | length 1043.3
  Top Layer w10: R4.2@369.41,1405 R4.2 ; C2.2@401.57,1165 C2.2 401.57,1240 C1.2 418.19,1256.61 IC1.8 ; C1.2@401.57,1260 401.57,1278.43 365,1315 185.86,1315 180,1320.86 TP1.TP1 364.41,1405 R4.2 ; J1.1 520,1620 369.41,1469.41 R4.2
NetC3_2: C3.2 R3.1 | length 122.8
  Top Layer w10: C3.2 R3.1
NetC4_1: C4.1 IC1.2 | length 79.7
  Top Layer w10: IC1.2 709.37,1282.2 C4.1
NetC4_2: C4.2 D1.2 IC1.1 L1.1 | length 915
  Top Layer w10: IC1.1 637.9,1256.61 642.37,1252.14 642.37,1237.63 661.17,1218.83 710.4,1218.83 C4.2 816.57,1223.43 861.26,1178.74 D1.2 845.51,1125 840.95,1129.56 764.56,1129.56 730.94,1095.94 730.94,875 830.66,775.28 851.61,775.28 876.89,750 L1.1@896.89,770
NetC5_1: C5.1 IC1.7 | length 152.8
  Top Layer w10: C5.1@346.57,1348.03 376.88,1348.03 398.31,1326.6 398.31,1309.97 425.33,1282.95 461.65,1282.95 IC1.7
NetC8_2: C8.2 R8.1 | length 55.3
  Top Layer w10: C8.2@2071.57,910 R8.1@2120.59,910 ; R8.1@2110.59,910 R8.1@2115,905.59
NetDt1_2: Dt1.2 J3.1 Lc.1 TP3.TP3 | length 563.8
  Top Layer w10: TP3.TP3@1615,1400 1620,1395 TP3.TP3 TP3.TP3@1633.11,1395 ; TP3.TP3@1618.11,1400 TP3.TP3@1633.11,1415 ; J3.1 1633.11,1718.11 TP3.TP3@1633.11,1415 ; Lc.1 1706.2,1280.73 Dt1.2 1705.97,1395 TP3.TP3@1633.11,1395 ; TP3.TP3@1633.11,1395 TP3.TP3@1633.11,1415
NetIC1_3: IC1.3 R5.2 | length 83.4
  Top Layer w10: IC1.3 638.35,1308.54 668.54,1308.54 693.54,1333.54 709.13,1333.54 R5.2@710,1334.41
NetIC1_5: IC1.5 R1.1 R2.2 | length 280.8
  Top Layer w10: IC1.5 514.14,1333.39 520,1327.53 520,1185.59 R2.2 530.59,1185 R1.1
NetIC1_6: IC1.6 R4.1 | length 139.2
  Top Layer w10: R4.1 420.59,1315.98 428.03,1308.54 461.65,1308.54 IC1.6
NetJ2_2: J2.2 L1.2 R1.2 R3.2 TP2.TP1 | length 1136.9
  Top Layer w10: J2.2@519.06,176.68 519.06,241.68 J2.2@524.06,236.68 ; J2.2@540,200 540,220.73 J2.2@524.06,236.68 ; R1.2 645.59,1148.71 601.88,1105 R3.2 575.59,1060.59 529.06,1014.06 L1.2 524.06,780 524.06,504.06 515,495 TP2.TP1 J2.2@524.06,236.68
OUT: C9.1 Dt2.2 J4.2 L2.2 R6.2 R8.2 TP4.TP4 | length 1561.6
  Top Layer w10: J4.2 TP4.TP4 Dt2.2 ; R6.2 1695.59,1040.59 1720,1065 2060,1065 2208.43,916.57 C9.1 ; R8.2 2115.95,858.46 2115.95,800.86 2121.81,795 2140,795
RCL: IC2.3 R10.2 | length 89.3
  Top Layer w10: IC2.3 1838.35,923.54 1873.54,923.54 1889.41,939.41 R10.2@1920,939.41
Ron: IC2.6 R9.1 | length 68
  Top Layer w10: R9.1 1598.39,922.8 IC2.6
SW: C10.2 D2.2 IC2.1 L2.1 | length 194.4
  Top Layer w10: IC2.1 1856.95,871.61 1869.67,858.89 1902.32,858.89 C10.2 ; D2.2 1959.14,775 1965,769.14 1965,765
VCC: C11.1 IC2.7 | length 183.5
  Top Layer w10: IC2.7 1722.2,897.2 1748.43,923.43 C11.1

## Polygon pours and split planes (outlines as drawn)
GND on Bottom Layer "GND_L02_P015" (solid, pour order 15): 0,1905 2475,1905 2475,5.01 0,0
GND on Top Layer "GND_L01_P016" (solid, pour order 16): 0,1905 2475,1905 2475,5.01 0,0
OUT on Top Layer "OUT_L01_P013" (solid, pour order 13): 2085,890 2235,890 2235,420 2085,420
SW on Top Layer "SW_L01_P011" (solid, pour order 11): 1775,885 1925,885 1925,828.46 1926.54,830 2070,830 2070,490 1850,490 1850,675 1775,675 1775,720 1775,710
FB on Top Layer "FB_L01_P010" (solid, pour order 10): 1615,1010 1615,1085 1675,1085 1675,980 1735,980 1735,935 1635,935 1635,950 1630,955 1550,955 1550,1005 1610,1005
IN on Top Layer "IN_L01_P009" (solid, pour order 9): 1720,885 1630,885 1630,885.12 1620,895.12 1617.32,892.44 1570,892.44 1570,947.56 1547.56,970 1470,970 1470,840 1720,840

## Other copper
Multi-Layer:

## Silkscreen, mask and mechanical layers (free items; w line width, h text height)
Top Overlay:
  drawing of 51 lines, arcs and shapes, not listed
  text "BEFORE" at 900,1810 h50
  text "AFTER" at 1235,1810 h50
  text "INPUT" at 1665,1480 h30
  text "INPUT" at 540,1460 h30
  text "DC-DC BUCK CONVERTER /       24V-5V" at 2450,400 h30 r90
  text "OUTPUT" at 495,395 h30
  text "DC-DC BUCK CONVERTER /       24V-5V" at 1185,395 h30 r90
  text "OUTPUT" at 1625,365 h30
Mechanical 1:
  the board outline again, w19.68